# Altium PCB bmsSlavePCB_L.PcbDoc (part 1 of 3)
Units mil, origin at the board's own origin, x right, y up, seen from the top; angles counter-clockwise.
Board outline 6375 x 5335 mil, 2 copper layers (Top Layer, Bottom Layer); 224 components, 153 nets, 536 pads, 45 vias.
Unrouted connection lines stored in the file: 34.
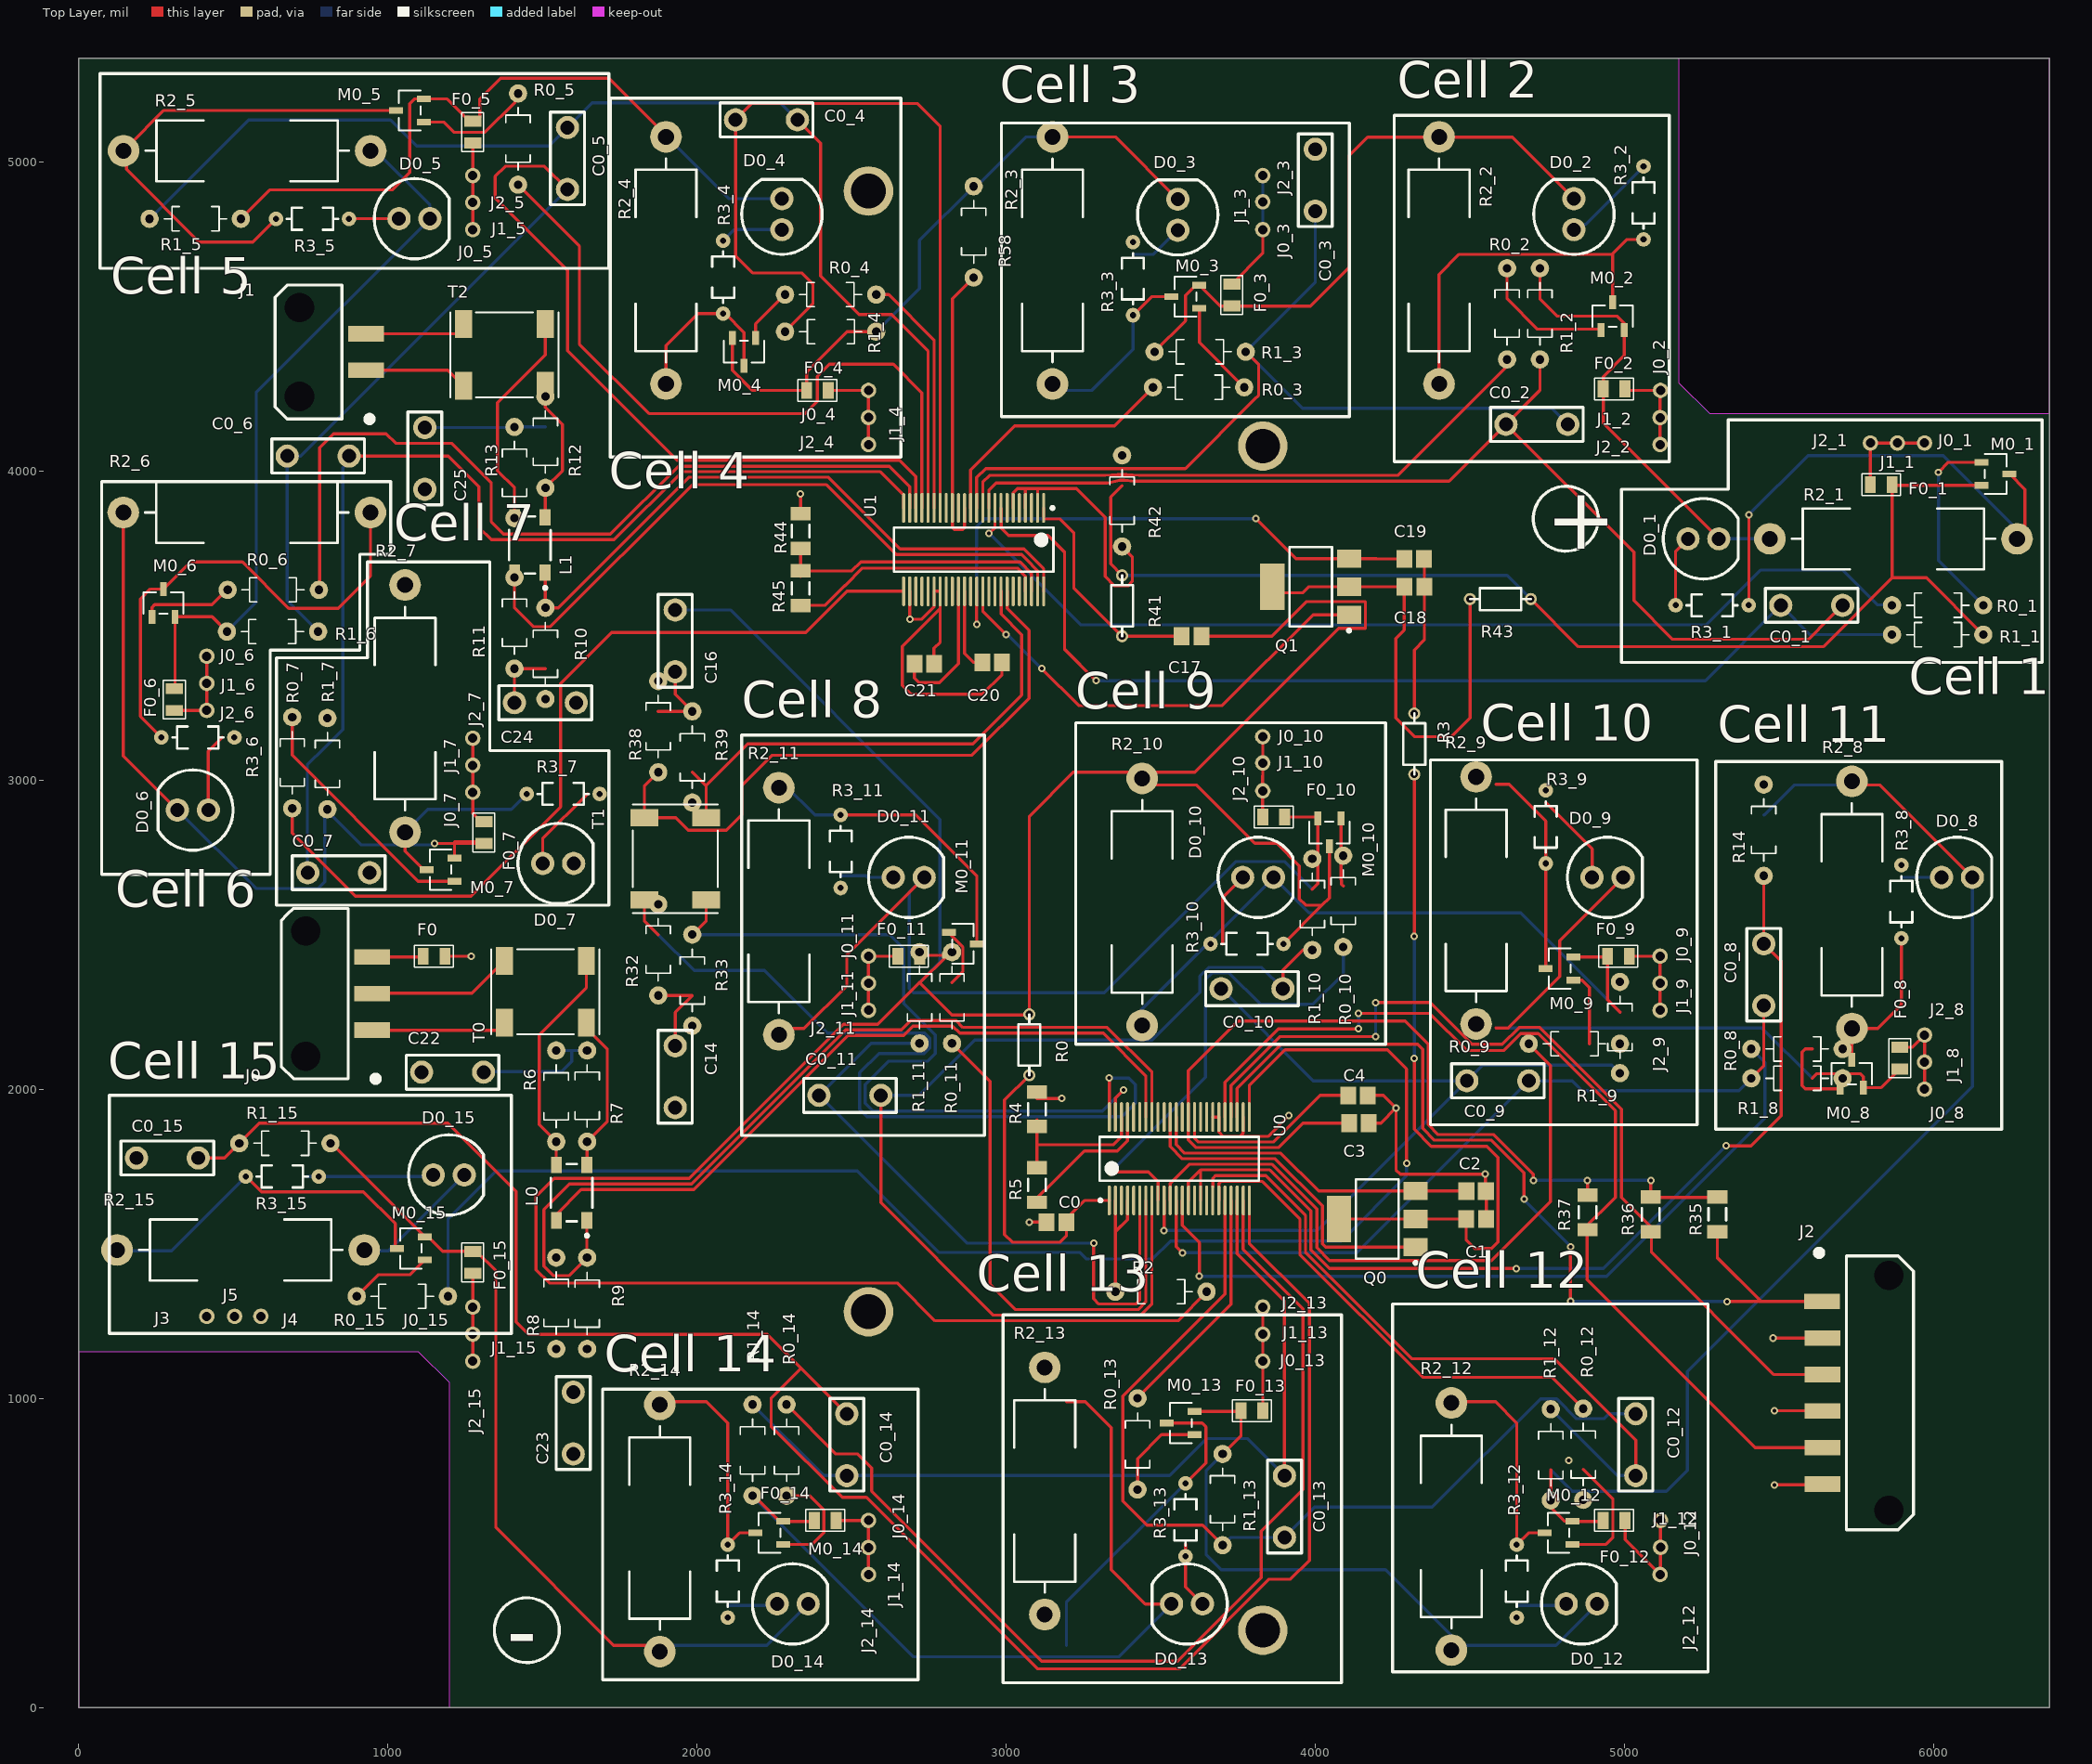
[diagram p0: Top Layer view]
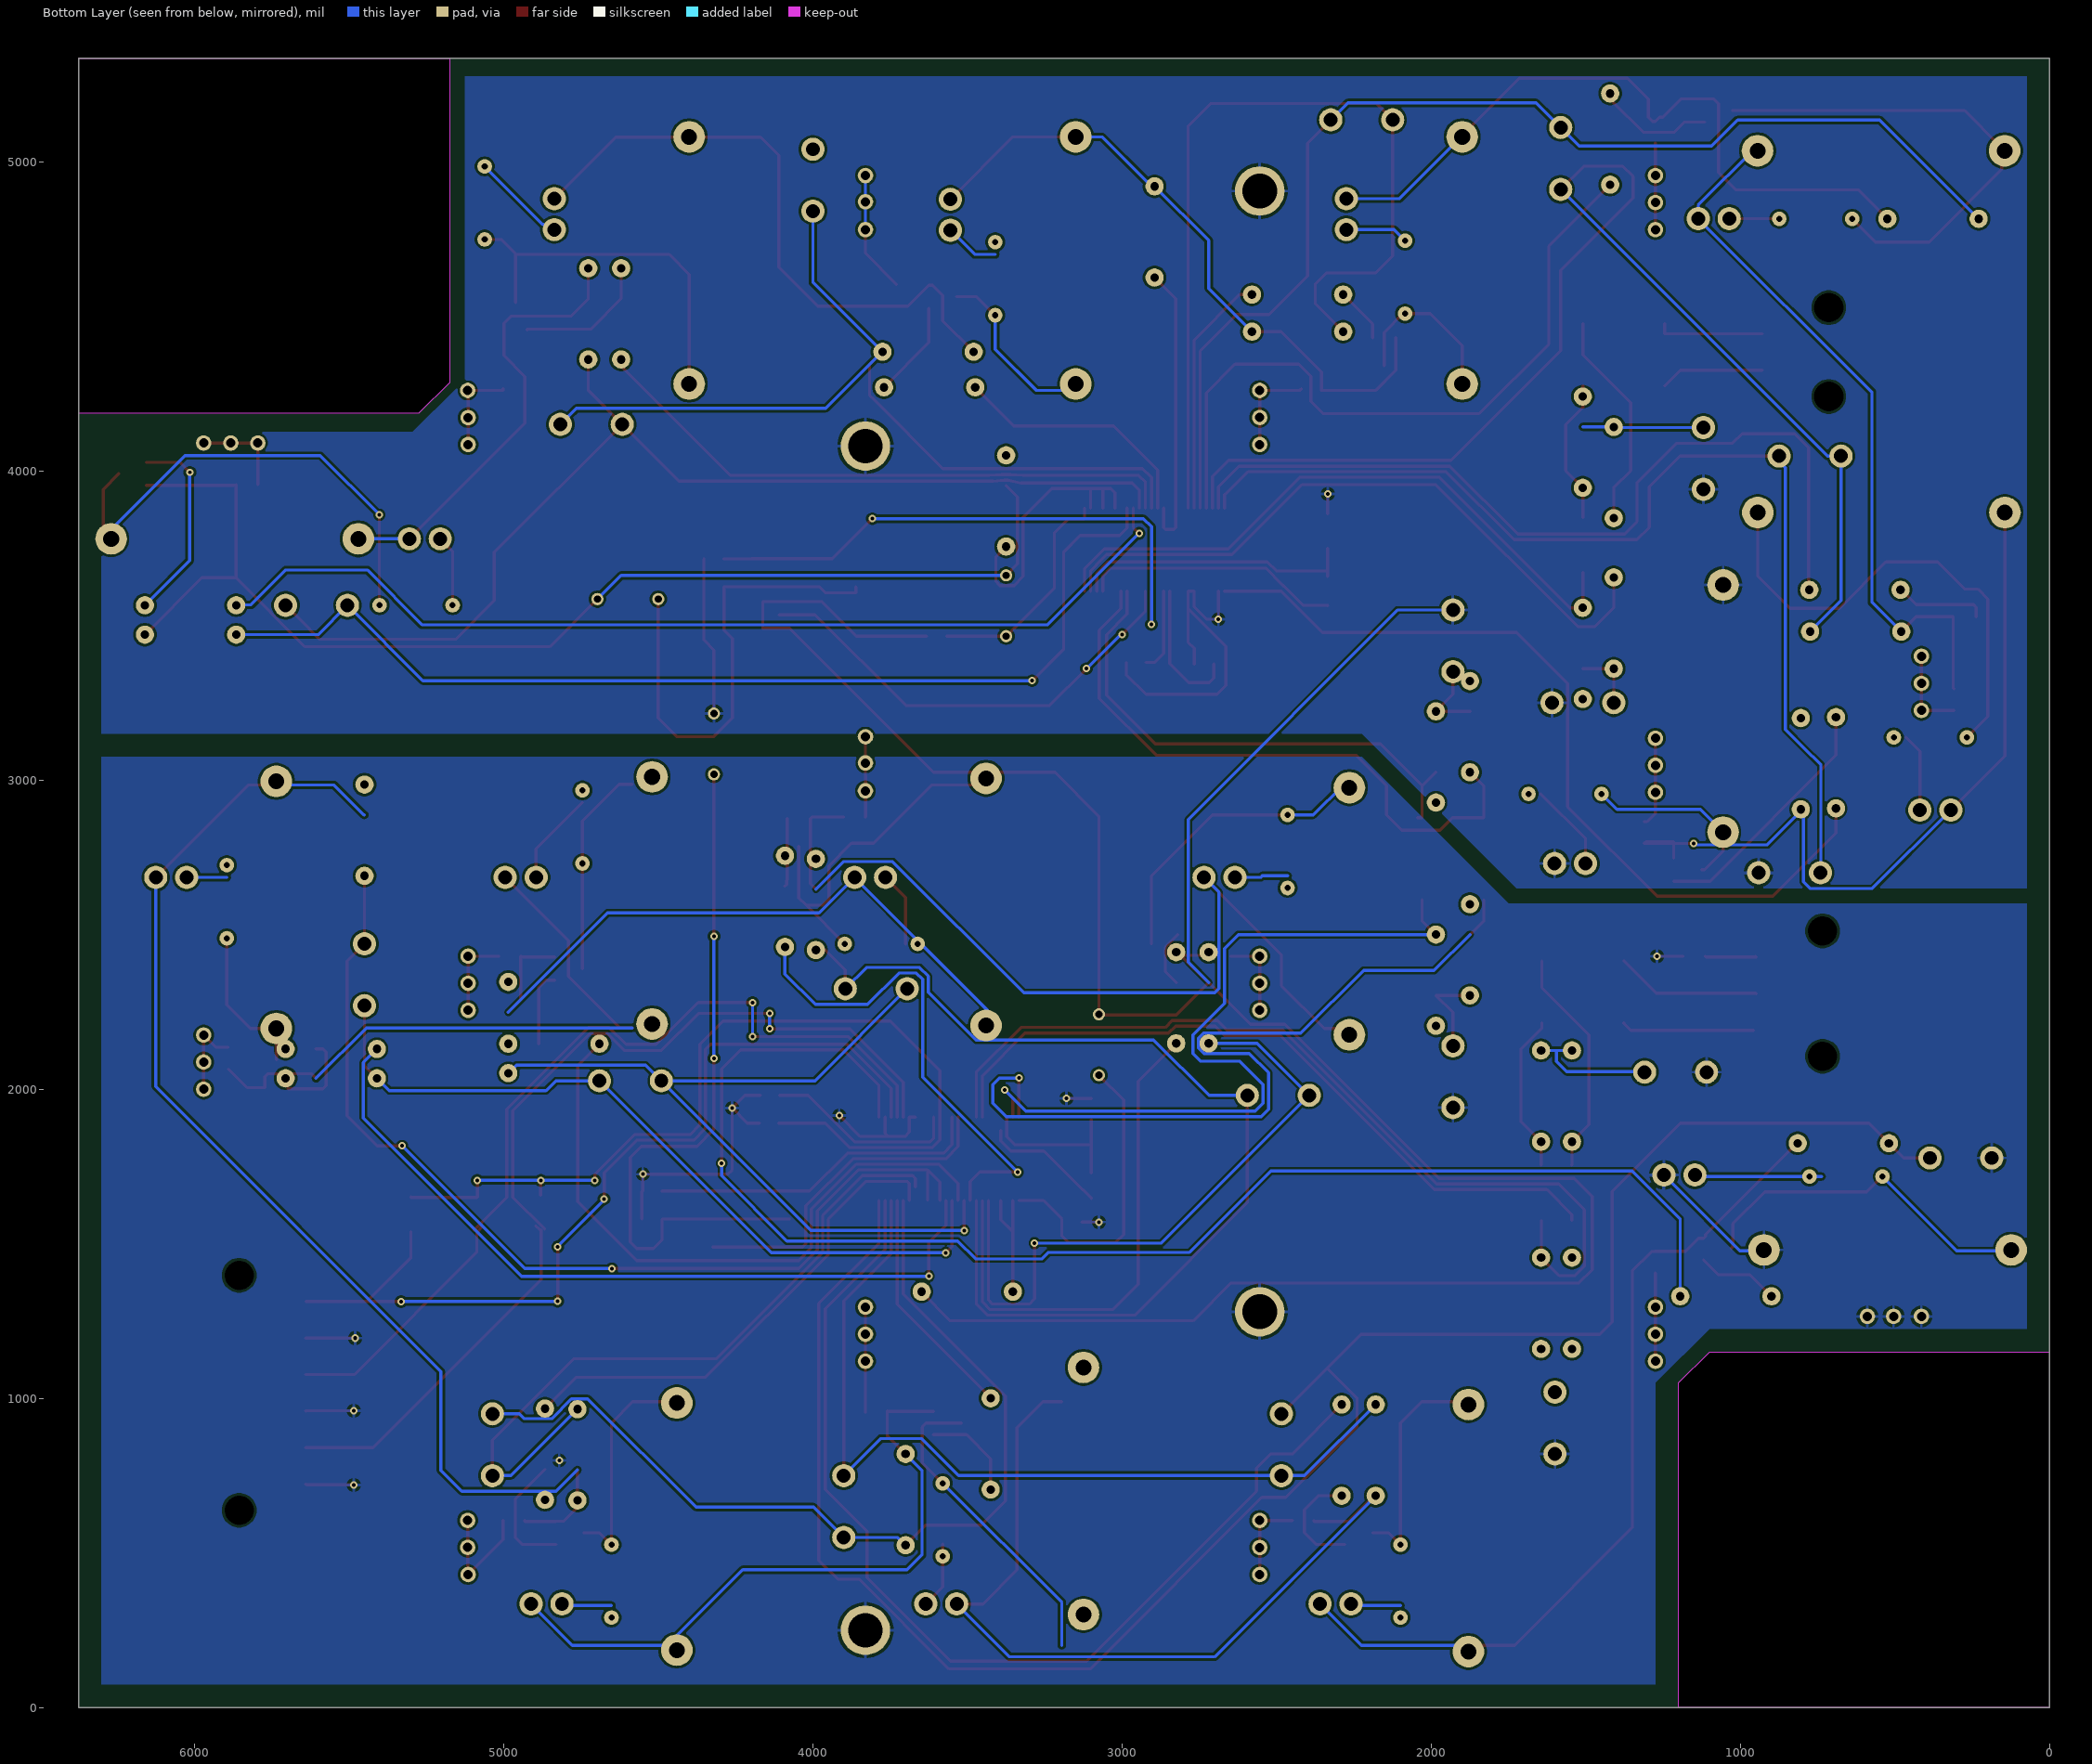
[diagram p1: Bottom Layer view, seen from below]

## Layer stack, top to bottom
Top Solder: solder mask 0.4, Solder Resist, Dk 3.5
Top Layer: signal copper 1.4
Dielectric 1: dielectric 12.6, FR-4, Dk 4.8
Bottom Layer: signal copper 1.4
Bottom Solder: solder mask 0.4, Solder Resist, Dk 3.5

## Board outline
0,0 6375,0 6375,5335 0,5335
cut-out: 6375,5335 5175,5335 5175,4285 5275,4185 6375,4185
cut-out: 0,0 1200,0 1200,1050 1100,1150 0,1150

## Design rules (kind name [scope] priority, off if disabled: settings)
Clearance [All] p1: gap=8 ignorepadtopadclearanceinfootprint=TRUE
PolygonConnect [All] p1: connectstyle=Relief reliefconductorwidth=10 reliefentries=4 polygonreliefangle="90 Angle" airgapwidth=10
RoomDefinition U_BalCircuitE [InComponentClass('U_BalCircuitE')] p1: confinementstyle=ConfineIn formatcopy=TRUE lockcomponents=FALSE outline 125.29,4933.02 125.29,5157.75 994.11,5157.75 994.11,5243.38 1149.11,5243.38 1149.11,5180.34 1324.02,5180.34 1324.02,5175.38 1651.61,5175.38 1651.61,4845.38 1322.62,4845.38 1322.62,4739.39 1214.2,4739.39 1214.2,4670.38 941.61,4670.38 941.61,4821.01 317.93,4821.01 317.93,4933.02
RoomDefinition U_BalCircuitM [InComponentClass('U_BalCircuitM')] p2: confinementstyle=ConfineIn formatcopy=TRUE lockcomponents=FALSE outline 3082.64,163.68 3082.64,1026.32 3783.99,1026.32 3783.99,1165.99 3783.99,1340.99 3875.99,1340.99 3875.99,815 3970,815 3970,485 3730,485 3730,190 3307.36,190 3307.36,163.68
RoomDefinition U_BalCircuitK [InComponentClass('U_BalCircuitK')] p3: confinementstyle=ConfineIn formatcopy=TRUE lockcomponents=FALSE outline 2172.64,2158.68 2172.64,3021.32 2397.36,3021.32 2397.36,2920.53 2514.37,2920.53 2514.37,2830 2812.58,2830 2812.58,2548 2937.5,2548 2937.5,2392 2874.37,2392 2874.37,2114.47 2660,2114.47 2660,1910 2330,1910 2330,2158.68
RoomDefinition U_BalCircuitI [InComponentClass('U_BalCircuitI')] p4: confinementstyle=ConfineIn formatcopy=TRUE lockcomponents=FALSE outline 4425,1956.85 4425,2096.85 4472.64,2096.85 4472.64,3023.17 4697.36,3023.17 4697.36,2960.53 4794.37,2960.53 4794.37,2830 5072.58,2830 5072.58,2476.01 5165.99,2476.01 5165.99,2209.01 5034.37,2209.01 5034.37,2018.17 4755,2018.17 4755,1956.85
RoomDefinition U_BalCircuitF [InComponentClass('U_BalCircuitF')] p5: confinementstyle=ConfineIn formatcopy=TRUE lockcomponents=FALSE outline 79.82,3748.7 79.82,3985.24 610,3985.24 610,4117.61 940,4117.61 940,3985.24 1009.39,3985.24 1009.39,3748.7 818.53,3748.7 818.53,3419.8 541.99,3419.8 541.99,3088.24 515,3088.24 515,2757.61 242.42,2757.61 242.42,3088.24 230.53,3088.24 230.53,3495.11 197,3495.11 197,3748.7
RoomDefinition U_BalCircuitH [InComponentClass('U_BalCircuitH')] p6: confinementstyle=ConfineIn formatcopy=TRUE lockcomponents=FALSE outline 5376.32,1985.63 5376.32,2179.37 5380,2179.37 5380,2535 5622.64,2535 5622.64,3021.32 5847.36,3021.32 5847.36,2830 6202.58,2830 6202.58,2540 6041.01,2540 6041.01,2129.01 6041.01,1954.01 5949.01,1954.01 5949.01,1972.5 5657,1972.5 5657,1985.63
RoomDefinition U_BalCircuitJ [InComponentClass('U_BalCircuitJ')] p7: confinementstyle=ConfineIn formatcopy=TRUE lockcomponents=FALSE outline 3322.87,2158.68 3322.87,3021.32 3783.89,3021.32 3783.89,3185.89 3875.89,3185.89 3875.89,3010.89 3876.12,3010.89 3876.12,2927.4 3939.96,2927.4 3939.96,2907.5 4123.24,2907.5 4123.24,2690.53 4139.61,2690.53 4139.61,2426.32 4039.61,2426.32 4039.61,2416.32 3960.24,2416.32 3960.24,2255 3547.6,2255 3547.6,2158.68
RoomDefinition U_BalCircuitL [InComponentClass('U_BalCircuitL')] p8: confinementstyle=ConfineIn formatcopy=TRUE lockcomponents=FALSE outline 4358.94,163.68 4358.94,1026.32 4583.66,1026.32 4583.66,1015 5106.3,1015 5106.3,651.01 5162.29,651.01 5162.29,559.01 5160.99,559.01 5160.99,384.01 4988.88,384.01 4988.88,190 4583.66,190 4583.66,163.68
RoomDefinition U_BalCircuitB [InComponentClass('U_BalCircuitB')] p9: confinementstyle=ConfineIn formatcopy=TRUE lockcomponents=FALSE outline 4358.94,4238.68 4358.94,5101.32 4583.66,5101.32 4583.66,4978.68 5110.67,4978.68 5110.67,4306.01 5162.31,4306.01 5162.31,4044.01 5070.31,4044.01 5070.31,4080 4551.3,4080 4551.3,4238.68
RoomDefinition U_BalCircuitO [InComponentClass('U_BalCircuitO')] p10: confinementstyle=ConfineIn formatcopy=TRUE lockcomponents=FALSE outline 116.27,1365.04 116.27,1589.76 122.6,1589.76 122.6,1847.4 507.06,1847.4 507.06,1851.77 853.23,1851.77 853.23,1852.94 1052.6,1852.94 1052.6,1867.4 1325.18,1867.4 1325.18,1577.4 1322.4,1577.4 1322.4,1365.04 1321.01,1365.04 1321.01,1074.01 1229.01,1074.01 1229.01,1359.4 1010.1,1359.4 1010.1,1365.04
RoomDefinition U_BalCircuitN [InComponentClass('U_BalCircuitN')] p11: confinementstyle=ConfineIn formatcopy=TRUE lockcomponents=FALSE outline 1807.4,163.68 1807.4,1026.32 2032.13,1026.32 2032.13,1015 2554.76,1015 2554.76,651.01 2605.76,651.01 2605.76,476.01 2605.99,476.01 2605.99,384.01 2437.35,384.01 2437.35,190 2032.13,190 2032.13,163.68
RoomDefinition U_BalCircuitG [InComponentClass('U_BalCircuitG')] p12: confinementstyle=ConfineIn formatcopy=TRUE lockcomponents=FALSE outline 641.93,2874.47 641.93,3138.68 943.93,3138.68 943.93,3656.32 1168.66,3656.32 1168.66,3226.01 1356.01,3226.01 1356.01,3051.01 1357.3,3051.01 1357.3,3004.37 1679.98,3004.37 1679.98,2905.63 1678.88,2905.63 1678.88,2585 1406.3,2585 1406.3,2630 676.3,2630 676.3,2874.47
RoomDefinition U_BalCircuitD [InComponentClass('U_BalCircuitD')] p13: confinementstyle=ConfineIn formatcopy=TRUE lockcomponents=FALSE outline 1807.64,4238.68 1807.64,5101.32 2060,5101.32 2060,5205 2390,5205 2390,4957.58 2420,4957.58 2420,4619.37 2538.68,4619.37 2538.68,4305.99 2600.99,4305.99 2600.99,4038.99 2508.99,4038.99 2508.99,4217.6 2310.04,4217.6 2310.04,4238.68
RoomDefinition U_BalCircuitC [InComponentClass('U_BalCircuitC')] p14: confinementstyle=ConfineIn formatcopy=TRUE lockcomponents=FALSE outline 3082.64,4236.83 3082.64,5099.47 3860,5099.47 3860,5103.15 4000,5103.15 4000,4773.15 3850.99,4773.15 3850.99,4732.16 3777.4,4732.16 3777.4,4493.19 3749.37,4493.19 3749.37,4192.61 3540.63,4192.61 3540.63,4236.83
RoomDefinition U_BalCircuitA [InComponentClass('U_BalCircuitA')] p15: confinementstyle=ConfineIn formatcopy=TRUE lockcomponents=FALSE outline 5110,3635 5110,3925 5749.01,3925 5749.01,4136 6016.01,4136 6016.01,4068 6277.5,4068 6277.5,3892.36 6361.95,3892.36 6361.95,3667.64 6203.53,3667.64 6203.53,3415.72 5821.47,3415.72 5821.47,3495 5440,3495 5440,3515.63 5127.38,3515.63 5127.38,3635
RoutingVias [All] p1: holewidth=28 width=50 viastyle="Through Hole" minholewidth=28 minwidth=50 maxholewidth=28 maxwidth=50
SolderMaskExpansion [All] p1: expansion=4 istentingtop=FALSE
Width [All] p1: maxlimit=10 minlimit=10 preferedwidth=10
30 further rules are at their usual default settings.

## Classes and differential pairs
channel class BalCircuit: U_BalCircuitA U_BalCircuitB U_BalCircuitC U_BalCircuitD U_BalCircuitE U_BalCircuitF U_BalCircuitG U_BalCircuitH U_BalCircuitI U_BalCircuitJ U_BalCircuitK U_BalCircuitL U_BalCircuitM U_BalCircuitN U_BalCircuitO U_BalCircuitP
component class U_BalCircuitO: C0_15 D0_15 F0_15 J0_15 J1_15 J2_15 M0_15 R0_15 R1_15 R2_15 R3_15
component class U_BalCircuitN: C0_14 D0_14 F0_14 J0_14 J1_14 J2_14 M0_14 R0_14 R1_14 R2_14 R3_14
component class U_BalCircuitM: C0_13 D0_13 F0_13 J0_13 J1_13 J2_13 M0_13 R0_13 R1_13 R2_13 R3_13
component class U_BalCircuitL: C0_12 D0_12 F0_12 J0_12 J1_12 J2_12 M0_12 R0_12 R1_12 R2_12 R3_12
component class U_BalCircuitK: C0_11 D0_11 F0_11 J0_11 J1_11 J2_11 M0_11 R0_11 R1_11 R2_11 R3_11
component class U_BalCircuitJ: C0_10 D0_10 F0_10 J0_10 J1_10 J2_10 M0_10 R0_10 R1_10 R2_10 R3_10
component class U_BalCircuitI: C0_9 D0_9 F0_9 J0_9 J1_9 J2_9 M0_9 R0_9 R1_9 R2_9 R3_9
component class U_BalCircuitH: C0_8 D0_8 F0_8 J0_8 J1_8 J2_8 M0_8 R0_8 R1_8 R2_8 R3_8
component class U_BalCircuitG: C0_7 D0_7 F0_7 J0_7 J1_7 J2_7 M0_7 R0_7 R1_7 R2_7 R3_7
component class U_BalCircuitF: C0_6 D0_6 F0_6 J0_6 J1_6 J2_6 M0_6 R0_6 R1_6 R2_6 R3_6
component class U_BalCircuitE: C0_5 D0_5 F0_5 J0_5 J1_5 J2_5 M0_5 R0_5 R1_5 R2_5 R3_5
component class U_BalCircuitD: C0_4 D0_4 F0_4 J0_4 J1_4 J2_4 M0_4 R0_4 R1_4 R2_4 R3_4
component class U_BalCircuitC: C0_3 D0_3 F0_3 J0_3 J1_3 J2_3 M0_3 R0_3 R1_3 R2_3 R3_3
component class U_BalCircuitB: C0_2 D0_2 F0_2 J0_2 J1_2 J2_2 M0_2 R0_2 R1_2 R2_2 R3_2
component class U_BalCircuitA: C0_1 D0_1 F0_1 J0_1 J1_1 J2_1 M0_1 R0_1 R1_1 R2_1 R3_1
component class Mosfets: M0_1 M0_2 M0_3 M0_4 M0_5 M0_6 M0_7 M0_8 M0_9 M0_10 M0_11 M0_12 M0_13 M0_14 M0_15
component class CellFuses: F0 F0_1 F0_2 F0_3 F0_4 F0_5 F0_6 F0_7 F0_8 F0_9 F0_10 F0_11 F0_12 F0_13 F0_14 F0_15

## Components (designator, comment, footprint, x,y, rotation, side; value= is the part's Value field where it differs from the comment)
C0 "0.1uF" CAPC2013X145X48NL20T23 3162.52,1570 r0 top
C0_1 "10nF" "Cap, 5mm TH, Ceramic" 5605,3565 r180 top value=Value? (schematic designator C0)
C0_2 "10nF" "Cap, 5mm TH, Ceramic" 4716.3,4150 r180 top value=Value? (schematic designator C0)
C0_3 "10nF" "Cap, 5mm TH, Ceramic" 4000,4940 r270 top value=Value? (schematic designator C0)
C0_4 "10nF" "Cap, 5mm TH, Ceramic" 2225,5135 r180 top value=Value? (schematic designator C0)
C0_5 "10nF" "Cap, 5mm TH, Ceramic" 1581.61,5010.38 r90 top value=Value? (schematic designator C0)
C0_6 "10nF" "Cap, 5mm TH, Ceramic" 775,4047.61 r180 top value=Value? (schematic designator C0)
C0_7 "10nF" "Cap, 5mm TH, Ceramic" 841.3,2700 r180 top value=Value? (schematic designator C0)
C0_8 "10nF" "Cap, 5mm TH, Ceramic" 5450,2370 r270 top value=Value? (schematic designator C0)
C0_9 "10nF" "Cap, 5mm TH, Ceramic" 4590,2026.85 r180 top value=Value? (schematic designator C0)
C0_10 "10nF" "Cap, 5mm TH, Ceramic" 3795.24,2325 r0 top value=Value? (schematic designator C0)
C0_11 "10nF" "Cap, 5mm TH, Ceramic" 2495,1980 r180 top value=Value? (schematic designator C0)
C0_12 "10nF" "Cap, 5mm TH, Ceramic" 5036.3,850 r270 top value=Value? (schematic designator C0)
C0_13 "10nF" "Cap, 5mm TH, Ceramic" 3900,650 r270 top value=Value? (schematic designator C0)
C0_14 "10nF" "Cap, 5mm TH, Ceramic" 2484.76,850 r270 top value=Value? (schematic designator C0)
C0_15 "10nF" "Cap, 5mm TH, Ceramic" 287.6,1777.4 r0 top value=Value? (schematic designator C0)
C1 "0.1uF" CAPC2013X145X48NL20T23 4520,1580 r0 top
C2 "1uF" CAPC2013X140X50NL20T25 4520,1670 r180 top
C3 "1uF" CAPC2013X140X50NL20T25 4141.5,1890 r180 top
C4 "1uF" CAPC2013X140X50NL20T25 4138.5,1980 r180 top
C14 "10nF" "Cap, 5mm TH, Ceramic" 1930,2040 r270 top value=Value?
C16 "10nF" "Cap, 5mm TH, Ceramic" 1930,3450 r270 top value=Value?
C17 "0.1uF" CAPC2013X145X48NL20T23 3600,3465 r180 top
C18 "0.1uF" CAPC2013X145X48NL20T23 4320,3625 r0 top
C19 "1uF" CAPC2013X140X50NL20T25 4320,3715 r180 top
C20 "1uF" CAPC2013X140X50NL20T25 2955,3380 r180 top
C21 "1uF" CAPC2013X140X50NL20T25 2735,3375 r180 top
C22 "10nF" "Cap, 5mm TH, Ceramic" 1210,2055 r0 top value=Value?
C23 "10nF" "Cap, 5mm TH, Ceramic" 1600,920 r90 top value=Value?
C24 "10nF" "Cap, 5mm TH, Ceramic" 1510,3250 r180 top value=Value?
C25 "10nF" "Cap, 5mm TH, Ceramic" 1120,4040 r90 top value=Value?
D0_1 "Green" "LED, TH" 5255,3780 r0 top (schematic designator D0)
D0_2 "Green" "LED, TH" 4836.3,4830 r90 top (schematic designator D0)
D0_3 "Green" "LED, TH" 3555,4828.15 r90 top (schematic designator D0)
D0_4 "Green" "LED, TH" 2275,4830 r90 top (schematic designator D0)
D0_5 "Green" "LED, TH" 1086.61,4815.38 r0 top (schematic designator D0)
D0_6 "Green" "LED, TH" 370,2902.61 r180 top (schematic designator D0)
D0_7 "Green" "LED, TH" 1551.3,2730 r0 top (schematic designator D0)
D0_8 "Green" "LED, TH" 6075,2685 r0 top (schematic designator D0)
D0_9 "Green" "LED, TH" 4945,2685 r0 top (schematic designator D0)
D0_10 "Green" "LED, TH" 3815,2685 r0 top (schematic designator D0)
D0_11 "Green" "LED, TH" 2685,2685 r0 top (schematic designator D0)
D0_12 "Green" "LED, TH" 4861.3,335 r0 top (schematic designator D0)
D0_13 "Green" "LED, TH" 3585,335 r180 top (schematic designator D0)
D0_14 "Green" "LED, TH" 2309.76,335 r0 top (schematic designator D0)
D0_15 "Green" "LED, TH" 1197.6,1722.4 r0 top (schematic designator D0)
F0 "1A" "Fuse, 0805" 1150,2430 r0 top
F0_1 "1A" "Fuse, 0805" 5830,3955 r180 top (schematic designator F0)
F0_2 "1A" "Fuse, 0805" 4966.3,4265 r0 top (schematic designator F0)
F0_3 "1A" "Fuse, 0805" 3730,4568.15 r90 top (schematic designator F0)
F0_4 "1A" "Fuse, 0805" 2390,4260 r0 top (schematic designator F0)
F0_5 "1A" "Fuse, 0805" 1275,5095.24 r270 top (schematic designator F0)
F0_6 "1A" "Fuse, 0805" 310,3260 r270 top (schematic designator F0)
F0_7 "1A" "Fuse, 0805" 1311.3,2830 r90 top (schematic designator F0)
F0_8 "1A" "Fuse, 0805" 5890,2100 r90 top (schematic designator F0)
F0_9 "1A" "Fuse, 0805" 4980,2430 r0 top (schematic designator F0)
F0_10 "1A" "Fuse, 0805" 3865,2880 r180 top (schematic designator F0)
F0_11 "1A" "Fuse, 0805" 2685,2430 r180 top (schematic designator F0)
F0_12 "1A" "Fuse, 0805" 4966.3,605 r0 top (schematic designator F0)
F0_13 "1A" "Fuse, 0805" 3795,960 r0 top (schematic designator F0)
F0_14 "1A" "Fuse, 0805" 2414.76,605 r0 top (schematic designator F0)
F0_15 "1A" "Fuse, 0805" 1275,1440 r270 top (schematic designator F0)
J0 "43650-0309" 43650-0309 734.65,2309.06 r270 top locked
J0_1 "Pogo Pin" 0929 5970,4090 r0 top (schematic designator J0)
J0_2 "Pogo Pin" 0929 5116.3,4260 r0 top (schematic designator J0)
J0_3 "Pogo Pin" 0929 3830,4780 r90 top (schematic designator J0)
J0_4 "Pogo Pin" 0929 2555,4260 r180 top (schematic designator J0)
J0_5 "Pogo Pin" 0929 1275,4780 r0 top (schematic designator J0)
J0_6 "Pogo Pin" 0929 415,3400 r0 top (schematic designator J0)
J0_7 "Pogo Pin" 0929 1275,2960 r0 top (schematic designator J0)
J0_8 "Pogo Pin" 0929 5970,2000 r0 top (schematic designator J0)
J0_9 "Pogo Pin" 0929 5115,2430 r90 top (schematic designator J0)
J0_10 "Pogo Pin" 0929 3829.88,3139.88 r0 top (schematic designator J0)
J0_11 "Pogo Pin" 0929 2555,2430 r0 top (schematic designator J0)
J0_12 "Pogo Pin" 0929 5116.3,605 r90 top (schematic designator J0)
J0_13 "Pogo Pin" 0929 3830,1120 r180 top (schematic designator J0)
J0_14 "Pogo Pin" 0929 2554.76,605 r90 top (schematic designator J0)
J0_15 "Pogo Pin" 0929 1275,1295 r0 top (schematic designator J0)
J1 "43650-0209" 43650-0209 714.65,4384.06 r270 top locked
J1_1 "Pogo Pin" 0929 5882.5,4090 r0 top (schematic designator J1)
J1_2 "Pogo Pin" 0929 5115,4171.85 r0 top (schematic designator J1)
J1_3 "Pogo Pin" 0929 3830,4870 r0 top (schematic designator J1)
J1_4 "Pogo Pin" 0929 2555,4172.5 r0 top (schematic designator J1)
J1_5 "Pogo Pin" 0929 1275,4867.5 r0 top (schematic designator J1)
J1_6 "Pogo Pin" 0929 415,3312.5 r0 top (schematic designator J1)
J1_7 "Pogo Pin" 0929 1275,3047.5 r0 top (schematic designator J1)
J1_8 "Pogo Pin" 0929 5970,2087.5 r0 top (schematic designator J1)
J1_9 "Pogo Pin" 0929 5115,2342.5 r0 top (schematic designator J1)
J1_10 "Pogo Pin" 0929 3830,3055 r0 top (schematic designator J1)
J1_11 "Pogo Pin" 0929 2555,2342.5 r0 top (schematic designator J1)
J1_12 "Pogo Pin" 0929 5116.3,518.15 r0 top (schematic designator J1)
J1_13 "Pogo Pin" 0929 3830,1207.5 r0 top (schematic designator J1)
J1_14 "Pogo Pin" 0929 2555,517.38 r90 top (schematic designator J1)
J1_15 "Pogo Pin" 0929 1275,1207.5 r0 top (schematic designator J1)
J2 "43650-0609" 43650-0609 5855.35,1017.83 r90 top locked
J2_1 "Pogo Pin" 0929 5795,4090 r0 top (schematic designator J2)
J2_2 "Pogo Pin" 0929 5115,4085 r0 top (schematic designator J2)
J2_3 "Pogo Pin" 0929 3830,4955 r90 top (schematic designator J2)
J2_4 "Pogo Pin" 0929 2555,4085 r180 top (schematic designator J2)
J2_5 "Pogo Pin" 0929 1275,4955 r0 top (schematic designator J2)
J2_6 "Pogo Pin" 0929 415,3225 r0 top (schematic designator J2)
J2_7 "Pogo Pin" 0929 1275,3135 r0 top (schematic designator J2)
J2_8 "Pogo Pin" 0929 5970,2175 r0 top (schematic designator J2)
J2_9 "Pogo Pin" 0929 5115,2255 r90 top (schematic designator J2)
J2_10 "Pogo Pin" 0929 3830.12,2964.88 r0 top (schematic designator J2)
J2_11 "Pogo Pin" 0929 2555,2255 r0 top (schematic designator J2)
J2_12 "Pogo Pin" 0929 5115,430 r90 top (schematic designator J2)
J2_13 "Pogo Pin" 0929 3830,1295 r180 top (schematic designator J2)
J2_14 "Pogo Pin" 0929 2555,430 r90 top (schematic designator J2)
J2_15 "Pogo Pin" 0929 1275,1120 r0 top (schematic designator J2)
J3 "Pogo Pin" 0929 415,1265 r180 top
J4 "Pogo Pin" 0929 590,1265 r90 top
J5 "Pogo Pin" 0929 505,1265 r0 top
L0 "DLW43SH101XK2L" FP-DLW43-0_2-t2_6-e0_6-MFG 1595,1665 r90 top
L1 "DLW43SH101XK2L" FP-DLW43-0_2-t2_6-e0_6-MFG 1460,3760 r90 top
M0_1 "NDS332P" SOT23_527AG_ONS 6200,3990 r270 top (schematic designator M0)
M0_2 "NDS332P" SOT23_527AG_ONS 4961.3,4500 r0 top (schematic designator M0)
M0_3 "NDS332P" SOT23_527AG_ONS 3580,4563.15 r90 top (schematic designator M0)
M0_4 "NDS332P" SOT23_527AG_ONS 2152.4,4385 r180 top (schematic designator M0)
M0_5 "NDS332P" SOT23_527AG_ONS 1071.61,5165.38 r90 top (schematic designator M0)
M0_6 "NDS332P" SOT23_527AG_ONS 275,3572.61 r0 top (schematic designator M0)
M0_7 "NDS332P" SOT23_527AG_ONS 1171.3,2710 r90 top (schematic designator M0)
M0_8 "NDS332P" SOT23_527AG_ONS 5735,2050 r0 top (schematic designator M0)
M0_9 "NDS332P" SOT23_527AG_ONS 4790,2390 r90 top (schematic designator M0)
M0_10 "NDS332P" SOT23_527AG_ONS 4045.24,2830 r180 top (schematic designator M0)
M0_11 "NDS332P" SOT23_527AG_ONS 2860,2470 r270 top (schematic designator M0)
M0_12 "NDS332P" SOT23_527AG_ONS 4786.3,565 r90 top (schematic designator M0)
M0_13 "NDS332P" SOT23_527AG_ONS 3565,920 r90 top (schematic designator M0)
M0_14 "NDS332P" SOT23_527AG_ONS 2234.76,565 r90 top (schematic designator M0)
M0_15 "NDS332P" SOT23_527AG_ONS 1075,1485 r90 top (schematic designator M0)
Q0 "NSV1C201MZ4T1G" ONSC-SOT-223-4-318E-04_V 4200,1580 r180 top
Q1 "NSV1C201MZ4T1G" ONSC-SOT-223-4-318E-04_V 3985,3625 r180 top
R0 "100R 1/2W" TH100R 3075,2045 r90 top
R0_1 "3.3KR" "Q Watt" 5865,3565 r0 top (schematic designator R0)
R0_2 "3.3KR" "Q Watt" 4620,4360 r90 top (schematic designator R0)
R0_3 "3.3KR" "Q Watt" 3475,4270 r0 top (schematic designator R0)
R0_4 "3.3KR" "Q Watt" 2580,4570 r180 top (schematic designator R0)
R0_5 "3.3KR" "Q Watt" 1421.61,4925.38 r90 top (schematic designator R0)
R0_6 "3.3KR" "Q Watt" 777.5,3615 r180 top (schematic designator R0)
R0_7 "3.3KR" "Q Watt" 691.3,2908.15 r90 top (schematic designator R0)
R0_8 "3.3KR" "Q Watt" 5410,2130 r0 top (schematic designator R0)
R0_9 "3.3KR" "Q Watt" 4690,2146.85 r0 top (schematic designator R0)
R0_10 "3.3KR" "Q Watt" 4090.24,2460 r90 top (schematic designator R0)
R0_11 "3.3KR" "Q Watt" 2825,2148.15 r90 top (schematic designator R0)
R0_12 "3.3KR" "Q Watt" 4866.3,966.85 r270 top (schematic designator R0)
R0_13 "3.3KR" "Q Watt" 3425,1000 r270 top (schematic designator R0)
R0_14 "3.3KR" "Q Watt" 2290,980 r270 top (schematic designator R0)
R0_15 "3.3KR" "Q Watt" 1195,1330 r180 top (schematic designator R0)
R1_1 "100R" "Q Watt" 5865,3470 r0 top (schematic designator R1)
R1_2 "100R" "Q Watt" 4726.3,4360 r90 top (schematic designator R1)
R1_3 "100R" "Q Watt" 3775,4385 r180 top (schematic designator R1)
R1_4 "100R" "Q Watt" 2285,4450 r0 top (schematic designator R1)
R1_5 "100R" "Q Watt" 230,4815 r0 top (schematic designator R1)
R1_6 "100R" "Q Watt" 775,3480 r180 top (schematic designator R1)
R1_7 "100R" "Q Watt" 805,3200 r270 top (schematic designator R1)
R1_8 "100R" "Q Watt" 5410,2035 r0 top (schematic designator R1)
R1_9 "100R" "Q Watt" 4985,2051.85 r90 top (schematic designator R1)
R1_10 "100R" "Q Watt" 3990.24,2450 r90 top (schematic designator R1)
R1_11 "100R" "Q Watt" 2720,2148.15 r90 top (schematic designator R1)
R1_12 "100R" "Q Watt" 4761.3,965 r270 top (schematic designator R1)
R1_13 "100R" "Q Watt" 3700,525 r90 top (schematic designator R1)
R1_14 "100R" "Q Watt" 2180,980 r270 top (schematic designator R1)
R1_15 "100R" "Q Watt" 520,1825 r0 top (schematic designator R1)
R2 "100R" "Q Watt" 3353.15,1345 r0 top
R2_1 "16R 2W" TH16R 5470,3780 r0 top (schematic designator R2)
R2_2 "16R 2W" TH16R 4400,5080 r270 top (schematic designator R2)
R2_3 "16R 2W" TH16R 3150,5080 r270 top (schematic designator R2)
R2_4 "16R 2W" TH16R 1900,5080 r270 top (schematic designator R2)
R2_5 "16R 2W" TH16R 945,5035 r180 top (schematic designator R2)
R2_6 "16R 2W" TH16R 145,3865 r0 top (schematic designator R2)
R2_7 "16R 2W" TH16R 1056.3,3630.51 r270 top (schematic designator R2)
R2_8 "16R 2W" TH16R 5735,2995.51 r270 top (schematic designator R2)
R2_9 "16R 2W" TH16R 4520,2210.79 r90 top (schematic designator R2)
R2_10 "16R 2W" TH16R 3440,2205.79 r90 top (schematic designator R2)
R2_11 "16R 2W" TH16R 2265,2175.79 r90 top (schematic designator R2)
R2_12 "16R 2W" TH16R 4440,185.79 r90 top (schematic designator R2)
R2_13 "16R 2W" TH16R 3125,300.79 r90 top (schematic designator R2)
R2_14 "16R 2W" TH16R 1880,180.79 r90 top (schematic designator R2)
R2_15 "16R 2W" TH16R 924.21,1480 r180 top (schematic designator R2)
R3 "100R 1/2W" Th100R 4320,3018.15 r90 top
R3_1 "180R" Th3.3KR 5401.22,3565 r180 top (schematic designator R3)
R3_2 "180R" Th3.3KR 5061.3,4748.15 r90 top (schematic designator R3)
R3_3 "180R" Th3.3KR 3410,4503.15 r90 top (schematic designator R3)
R3_4 "180R" Th3.3KR 2085,4508.15 r90 top (schematic designator R3)
R3_5 "180R" Th3.3KR 638.78,4815 r0 top (schematic designator R3)
R3_6 "180R" Th3.3KR 268.15,3137.61 r0 top (schematic designator R3)
R3_7 "180R" Th3.3KR 1449.45,2955 r0 top (schematic designator R3)
R3_8 "180R" Th3.3KR 5895,2488.15 r90 top (schematic designator R3)
R3_9 "180R" Th3.3KR 4745,2730 r90 top (schematic designator R3)
R3_10 "180R" Th3.3KR 3897.09,2470 r180 top (schematic designator R3)
R3_11 "180R" Th3.3KR 2465,2886.85 r270 top (schematic designator R3)
R3_12 "180R" Th3.3KR 4651.3,526.85 r270 top (schematic designator R3)
R3_13 "180R" Th3.3KR 3580,725 r270 top (schematic designator R3)
R3_14 "180R" Th3.3KR 2099.76,526.85 r270 top (schematic designator R3)
R3_15 "180R" Th3.3KR 540.75,1717.4 r0 top (schematic designator R3)
R4 "1.21KR" RESC3216X70X50NL05T20 3100,1935 r270 top
R5 "806R" RESC3216X70X50NL05T20 3100,1690 r270 top
R6 "300R" "Q Watt" 1545,2125 r270 top
R7 "300R" "Q Watt" 1645,1830 r90 top
R8 "62R" "Q Watt" 1545,1160 r90 top
R9 "62R" "Q Watt" 1645,1455 r270 top
R10 "62R" "Q Watt" 1510,3556.85 r270 top
R11 "62R" "Q Watt" 1410,3360 r90 top
R12 "300R" "Q Watt" 1510,3945 r90 top
R13 "300R" "Q Watt" 1410,4141.85 r270 top
R14 "100R" "Q Watt" 5450,2690 r90 top
R32 "62R" "Q Watt" 1875,2303.15 r90 top
R33 "62R" "Q Watt" 1985,2500 r270 top
R35 "10kR" RESC3216X70X50NL05T20 5300,1595 r90 top
R36 "10kR" RESC3216X70X50NL05T20 5085,1595 r90 top
R37 "10kR" RESC3216X70X50NL05T20 4880,1601.61 r90 top
R38 "62R" "Q Watt" 1875,3025 r90 top
R39 "62R" "Q Watt" 1985,3221.85 r270 top
R41 "100R 1/2W" TH100R 3375,3465 r90 top
R42 "100R" "Q Watt" 3375,3755 r90 top
R43 "100R 1/2W" TH100R 4500,3585 r0 top
R44 "1.21KR" RESC3216X70X50NL05T20 2335,3805 r270 top
R45 "806R" RESC3216X70X50NL05T20 2335,3620 r270 top
R58 "100R" "Q Watt" 2895,4625 r90 top
T0 "PE-68386NLT" PE-68386NL_PUL 1510,2315 r0 top
T1 "PE-68386NLT" PE-68386NL_PUL 1930,2745 r90 top
T2 "PE-68386NLT" PE-68386NL_PUL 1377.5,4375 r180 top
U0 "LTC6804HG-1#TRPBF" LT-G-48_M 3560,1775 r90 top locked
U1 "LTC6804HG-1#TRPBF" LT-G-48_M 2895,3745 r270 top locked

## Footprints (in the part's own frame and the unit in brackets; to place one, negate y for a bottom-side part, rotate by r counter-clockwise, add the part's x,y. Pads: shape width x height; smd on the part's side, far side on the other; paste and mask are expansions set on the pad)
0929 [mil] "Mill-Max Spring Loaded Contact"
  round 50 hole 30: 0(0,0)
  body extent -36,-36 36,36, height 220
43650-0209 [mm] "Molex 2 Position Board Header, Right Angle"
  rect 1.27x2.92 smd: 1(1.5,5.47) 2(-1.5,5.47)
  round 0 hole 2.41 unplated: ""(-3.65,0) ""(3.65,0)
  silkscreen extent -5.5,-2 5.7,5.95, body extent -4.82,-4.6 4.83,6.14, height 5.64
43650-0309 [mm] "Molex 3 Position Board Header, Right Angle"
  rect 1.27x2.92 smd: 1(3,5.47) 2(0,5.47) 3(-3,5.47)
  round 0 hole 2.41 unplated: ""(-5.15,0) ""(5.15,0)
  silkscreen extent -7,-2 7.2,5.95, body extent -6.32,-4.6 6.33,6.14, height 5.64
43650-0609 [mm] "Molex 6 Position Board Header, Right Angle"
  rect 1.27x2.92 smd: 1(7.5,5.5) 2(4.5,5.47) 3(1.5,5.47) 4(-1.5,5.47) 5(-4.5,5.47) 6(-7.5,5.47)
  round 0 hole 2.41 unplated: ""(-9.65,0) ""(9.65,0)
  silkscreen extent -11.25,-2 11.7,5.95, body extent -10.82,-4.6 10.82,6.14, height 5.64
"Cap, 5mm TH, Ceramic" [mil] "Through Hole Cap, Ceramic"
  round 75 hole 45: 1(-100,0) 2(100,0)
  silkscreen extent -150,-55 150,55, body extent -109,-59 109,59, height 176
CAPC2013X140X50NL20T25 [mm] "Chip Capacitor, 2-Leads, Body 2.00x1.25mm, IPC Medium Density"
  rect 1.3x1.45 smd: 1(-0.8,0) 2(0.8,0)
  body extent -1.1,-0.72 1.1,0.72, height 1.4
CAPC2013X145X48NL20T23 [mm] "Chip Capacitor, 2-Leads, Body 2.00x1.25mm, IPC Medium Density"
  rect 1.3x1.45 smd: 1(-0.825,0) 2(0.825,0)
  body extent -1.1,-0.72 1.1,0.72, height 1.45
FP-DLW43-0_2-t2_6-e0_6-MFG [mm]
  rect 1.35x0.9 smd paste+0 mask+0: 1(-2.275,-1.25) 2(2.275,-1.25) 3(2.275,1.25) 4(-2.275,1.25)
  silkscreen extent -3.65,-1.7 2.35,1.7, body extent -3.05,-1.8 3.05,1.8, height 0.25
"Fuse, 0805" [mil] "Generic 0805 SMD Fuse"
  rect 35.51x55 smd: 1(-35.24,0) 2(35.24,0)
  silkscreen extent -63,-35 63,35, body extent -33,-18 33,18, height 22
"LED, TH" [mil] "Through Hole LED"
  round 75 hole 45: 1(-50,0) 2(50,0)
  silkscreen extent -130,-130 113,130, body extent -118,-118 98,118, height 346
LT-G-48_M [mm] "SOP, 48-Leads, Body 13.1x5.6mm, Pitch 0.5mm, IPC Low Density"
  oval 2.45x0.25 smd: 1(-3.425,5.75) 2(-3.425,5.25) 3(-3.425,4.75) 4(-3.425,4.25) 5(-3.425,3.75) 6(-3.425,3.25) 7(-3.425,2.75) 8(-3.425,2.25) 9(-3.425,1.75) 10(-3.425,1.25) 11(-3.425,0.75) 12(-3.425,0.25) 13(-3.425,-0.25) 14(-3.425,-0.75) 15(-3.425,-1.25) 16(-3.425,-1.75) 17(-3.425,-2.25) 18(-3.425,-2.75) 19(-3.425,-3.25) 20(-3.425,-3.75) 21(-3.425,-4.25) 22(-3.425,-4.75) 23(-3.425,-5.25) 24(-3.425,-5.75) 25(3.425,-5.75) 26(3.425,-5.25) 27(3.425,-4.75) 28(3.425,-4.25) 29(3.425,-3.75) 30(3.425,-3.25) 31(3.425,-2.75) 32(3.425,-2.25) 33(3.425,-1.75) 34(3.425,-1.25) 35(3.425,-0.75) 36(3.425,-0.25) 37(3.425,0.25) 38(3.425,0.75) 39(3.425,1.25) 40(3.425,1.75) 41(3.425,2.25) 42(3.425,2.75) 43(3.425,3.25) 44(3.425,3.75) 45(3.425,4.25) 46(3.425,4.75) 47(3.425,5.25) 48(3.425,5.75)
  silkscreen extent -3.55,-6.55 1.8,6.6, body extent -2.8,-6.55 2.8,6.55, height 2
ONSC-SOT-223-4-318E-04_V [mm] "SOT223, 4-Leads, Body 6.5x3.5mm, Pitch 2.3mm"
  rect 2x1.5 smd: 1(-3.15,2.3) 2(-3.15,0) 3(-3.15,-2.3)
  rect 2x3.8 smd: 4(3.15,0)
  silkscreen extent -3.27,-3.25 1.75,3.72, body extent -1.75,-3.25 1.75,3.25, height 1.75
PE-68386NL_PUL [mil]
  rect 55x90 smd paste-27.5 mask+0: 1(-132.5,100) 2(-132.5,-100) 3(132.5,-100) 4(132.5,100)
  silkscreen extent -175,-138 175,138, body extent 0,0 10,10, height 10
"Q Watt" [mm] "1/8W Thruhole"
  round 1.5 hole 0.7: 1(0,0) 2(7.493,0)
  silkscreen extent 1.18,-1 6.33,1, body extent -0.24,-1.12 7.66,1.03, height 2.17
RESC3216X70X50NL05T20 [mm] "Chip Resistor, 2-Leads, Body 3.20x1.60mm, IPC Medium Density"
  rect 1.1x1.65 smd: 1(-1.425,0) 2(1.425,0)
  silkscreen extent -0.5,-0.72 0.5,0.72, body extent -1.63,-0.82 1.62,0.82, height 0.7
SOT23_527AG_ONS [mil]
  rect 22x45 smd paste+0 mask+0: 1(-37.4,-45) 2(37.4,-45) 3(0,45)
  silkscreen extent -65,-35 65,35, body extent -60,-30 60,30, height 30
Th3.3KR [mm]
  round 1.2 hole 0.5: 1(0,0) 2(6,0)
  silkscreen extent 0.9,-0.9 5.1,0.9, body extent -0.2,-0.9 6.2,0.9, height 1.9
TH16R [mm]
  round 2.6 hole 1.3: 1(0,0) 2(20.3,0)
  silkscreen extent 1.8,-2.5 18.5,2.5, body extent -0.31,-2.7 20.71,2.8, height 5.5
TH100R [mm] "1/8W Thruhole"
  round 1 hole 0.6: 1(0,0) 2(5,0)
  silkscreen extent 0,-0.9 5,0.9, body extent -0.22,-0.9 5.23,0.89, height 1.9
Th100R [mm] "1/8W Thruhole"
  round 1 hole 0.6: 1(0,0) 2(5,0)
  silkscreen extent 0,-0.9 5,0.9, body extent -0.22,-0.9 5.23,0.89, height 1.9

## Part data
C0 C1 C17 C18: library part CMP-2007-01705-1, Manufacturer=Vitramon, Part Number=VJ0805Y104KXAMR
C0_1 C0_2 C0_3 C0_4 C0_5 C0_6 C0_7 C0_8 C0_9 C0_10 C0_11 C0_12 C0_13 C0_14 C0_15 C14 C16 C22 C23 C24 C25: library part "Cap, 5MM TH, Ceramic", "Generic Cap, 5MM TH, Ceramic", Published=22Oct2016, Publisher=T.Tallo, Status=Active, TargetLibrary=RITRacing-Passives
C2 C3 C4 C19 C20 C21: library part CMP-1036-04765-2, Manufacturer="AVX Interconnect / Elco", Part Number=08055G105ZAT2A
D0_1 D0_2 D0_3 D0_4 D0_5 D0_6 D0_7 D0_8 D0_9 D0_10 D0_11 D0_12 D0_13 D0_14 D0_15: library part TLHG6400CS12Z, "LED Uni-Color Green 565nm 2-Pin T-1 3/4 T/R", Case/Package=Radial, Forward Current=30mA, Forward Voltage=2.4V, Manufacturer 1="Vishay Semiconductors", Max Operating Temperature=100°C, Min Operating Temperature=-40°C, Power Dissipation=100mW, Reverse Voltage=15V, Test Current=10mA, Category=LEDs, Color=Green, ComponentLink1Description=https://datasheet.ciiva.com/26262/tlhg640-26262876.pdf?src-supplier=Avnet+Europe, ComponentLink1URL=https://datasheet.ciiva.com/26262/tlhg640-26262876.pdf?src-supplier=Avnet+Europe, Depth=5.8mm, Dominant Wavelength=569nm, Height=9mm, Length=5.8mm, Lens Size=5mm, Lens Style=Round,Domed,Diffused,Colored,Circular, Lens Transparency=Diffused, Luminous Intensity=10mcd, Manufacturer Part Number 1=TLHG6400CS12Z, Mount="Through Hole", Number of Elements=1, Number of LEDs=1, Number of Pins=2, Packaging="Tape and Reel", Pricing 1="1=0.46000, 10=0.28000, 100=0.16120 (USD)", Radiation Hardening=No, RoHS=Yes, Stock 1=4186, Supplier 1=Digi-Key, Viewing Angle=60°
F0 F0_1 F0_2 F0_3 F0_4 F0_5 F0_6 F0_7 F0_8 F0_9 F0_10 F0_11 F0_12 F0_13 F0_14 F0_15: library part "Fuse, 0805", "Generic 0805 Fuse", Manufacturer_Part_Number=MFU0805FF01000P100, Built_By=EMA_UL_Team, ClassName=CellFuses, Copyright="Copyright (C) 2018 Accelerated Designs. All rights reserved", RefDes=RefDes, SourceLibrary=Vishay_2010-01-01_FUSE_MFU, Type=DEV, Vendor=VISHAY
J0: "Molex 3 Position Board Header, RIght Angle", Manufacturer=Molex, Voltage=600V, ComponentLink1Description=Datasheet, ComponentLink1URL=http://www.mouser.com/ds/2/418/NG_CD_1445088_A1-614413.pdf, PartNumber=43650-0309, Published=13Aug2018, Publisher=T.Tallo, Status=Active, TargetLibrary=RITRacing-Connectors
J0_1 J0_2 J0_3 J0_4 J0_5 J0_6 J0_7 J0_8 J0_9 J0_10 J0_11 J0_12 J0_13 J0_14 J0_15 J1_1 J1_2 J1_3 J1_4 J1_5 J1_6 J1_7 J1_8 J1_9 J1_10 J1_11 J1_12 J1_13 J1_14 J1_15 J2_1 J2_2 J2_3 J2_4 J2_5 J2_6 J2_7 J2_8 J2_9 J2_10 J2_11 J2_12 J2_13 J2_14 J2_15 J3 J4 J5: library part 0929-0-15-20-75-14-11-0
J1: "Molex 2 Position Board Header, RIght Angle", Manufacturer=Molex, Voltage=600V, ComponentLink1Description=Datasheet, ComponentLink1URL=http://www.mouser.com/ds/2/418/NG_CD_1445088_A1-614413.pdf, PartNumber=43650-0209, Published=13Aug2018, Publisher=T.Tallo, Status=Active, TargetLibrary=RITRacing-Connectors
J2: "Molex 6 Position Board Header, RIght Angle", Manufacturer=Molex, Voltage=600V, ComponentLink1Description=Datasheet, ComponentLink1URL=http://www.mouser.com/ds/2/418/NG_CD_1445088_A1-614413.pdf, PartNumber=43650-0609, Published=13Aug2018, Publisher=T.Tallo, Status=Active, TargetLibrary=RITRacing-Connectors
L0 L1: library part CMP-06045-000059-1, "CMC 100UH 200MA 2LN SMD AEC-Q200", Case Code (Imperial)=1812, Case Code (Metric)=4532, Current=200mA, DC Resistance (DCR)=2R, Inductance=100uH, Max Operating Temperature=125°C, Min Operating Temperature=-40°C, Package Quantity=1, Test Frequency=1MHz, Tolerance=50%, Voltage Rating=50V, Case/Package=1812, Current Rating=200mA, DC Current=200mA, Depth=3.4mm, Height=2.6mm, Lead Free="Lead Free", Length=4.5mm, Max DC Current=200mA, Military Standard=Not, Mount="Surface Mount", Number of Lines=2, Packaging="Tape and Reel", Radiation Hardening=No, REACH SVHC="No SVHC", Shielding=Unshielded, Termination=SMD/SMT, Weight=0.005997oz, Width=0.126inch
M0_1 M0_2 M0_3 M0_4 M0_5 M0_6 M0_7 M0_8 M0_9 M0_10 M0_11 M0_12 M0_13 M0_14 M0_15: "MOSFET P-CH 20V 1A SSOT3", Manufacturer 1="ON Semiconductor", Supplier Part Number 1=NDS332PCT-ND, ClassName=Mosfets, ComponentLink1Description=https://datasheet.ciiva.com/931/nds332p-931840.pdf?src-supplier=Digi-Key, ComponentLink1URL=https://datasheet.ciiva.com/931/nds332p-931840.pdf?src-supplier=Digi-Key, ComponentLink2Description=https://datasheet.ciiva.com/22681/1815140-22681925.pdf?src-supplier=Element14, ComponentLink2URL=https://datasheet.ciiva.com/22681/1815140-22681925.pdf?src-supplier=Element14, ComponentLink3Description=https://datasheet.ciiva.com/19479/874752-19479886.pdf?src-supplier=Jameco, ComponentLink3URL=https://datasheet.ciiva.com/19479/874752-19479886.pdf?src-supplier=Jameco, ComponentLink4Description=https://datasheet.ciiva.com/4441/nds332p-96390-4441376.pdf?src-supplier=Mouser, ComponentLink4URL=https://datasheet.ciiva.com/4441/nds332p-96390-4441376.pdf?src-supplier=Mouser, ComponentLink5Description=https://datasheet.ciiva.com/6037/192744-6037617.pdf?src-supplier=Farnell, ComponentLink5URL=https://datasheet.ciiva.com/6037/192744-6037617.pdf?src-supplier=Farnell, ComponentLink6Description=https://datasheet.ciiva.com/22681/1815140-22681813.pdf?src-supplier=Element14, ComponentLink6URL=https://datasheet.ciiva.com/22681/1815140-22681813.pdf?src-supplier=Element14, ComponentLink7Description=https://datasheet.ciiva.com/22681/1815140-22681814.pdf?src-supplier=Element14, ComponentLink7URL=https://datasheet.ciiva.com/22681/1815140-22681814.pdf?src-supplier=Element14, ComponentLink8Description=https://datasheet.ciiva.com/22681/1815140-22681815.pdf?src-supplier=Element14, ComponentLink8URL=https://datasheet.ciiva.com/22681/1815140-22681815.pdf?src-supplier=Element14, ComponentLink9Description=https://datasheet.ciiva.com/931/nds332p-931841.pdf?src-supplier=Digi-Key, ComponentLink9URL=https://datasheet.ciiva.com/931/nds332p-931841.pdf?src-supplier=Digi-Key, ComponentLink10Description=https://datasheet.ciiva.com/6037/192744-6037734.pdf?src-supplier=Farnell, ComponentLink10URL=https://datasheet.ciiva.com/6037/192744-6037734.pdf?src-supplier=Farnell, ComponentLink11Description=https://datasheet.ciiva.com/16772/nds332p-16772443.pdf?src-supplier=Future+Electronics, ComponentLink11URL=https://datasheet.ciiva.com/16772/nds332p-16772443.pdf?src-supplier=Future+Electronics, ComponentLink12Description=https://datasheet.ciiva.com/8114/nds332p-8114766.pdf?src-supplier=Avnet, ComponentLink12URL=https://datasheet.ciiva.com/8114/nds332p-8114766.pdf?src-supplier=Avnet, Manufacturer Part Number 1=NDS332P, Pricing 1="1=0.37000, 10=0.29600, 100=0.20180, 500=0.15132, 1000=0.11349 (USD)", RoHS=No, Stock 1=103711, Supplier 1=Digi-Key
Q0 Q1: library part CMP-1048-00450-1, "100 V, 2 A, Low VCE(sat), NPN Transistor, 4-Pin SOT-223, Pb-Free, Tape and Reel", Manufacturer="On Semiconductor", ComponentLink1Description="Manufacturer URL", ComponentLink1URL=http://www.onsemi.com/, ComponentLink2Description=Datasheet, ComponentLink2URL=http://www.onsemi.cn/pub_link/Collateral/NSS1C201MZ4-D.PDF, ComponentLink3Description="Package Specification", ComponentLink3URL=http://www.onsemi.com/pub_link/Collateral/318E-04.PDF, DatasheetVersion="Rev. 4", IC Continuous (A)=2, Mounting Technology="Surface Mount", Note1=0, PackageDescription="4-Pin Small Outline Transistor, Body 6.5 x 3.5 mm, Pitch 2.3 mm", PackageReference=SOT-223-4-318E-04, PackageVersion="Rev. N, 08/2009", Packing="Tape and Reel", PartNumber=NSV1C201MZ4T1G, Polarity=NPN, RoHS=TRUE
R0 R3 R41 R43: library part SFR16S0001000FR500, "Res Metal Film 100 Ohm 1% 1/2W 100ppm/C Conformal AXL Thru-Hole T/R", Case/Package=Axial, Manufacturer 1="Vishay BCcomponents", Max Operating Temperature=155°C, Max Power Dissipation=500mW, Min Operating Temperature=-55°C, Package Quantity=1, Resistance=100R, Resistance Tolerance=1%, Resistor Type="Metal Film", Temperature Coefficient=100ppm/°C, Voltage Rating=200V, Category="Through-Hole Resistors", ComponentLink1Description=https://datasheet.ciiva.com/2710/sfr16s25-2710549.pdf?src-supplier=Digi-Key, ComponentLink1URL=https://datasheet.ciiva.com/2710/sfr16s25-2710549.pdf?src-supplier=Digi-Key, ComponentLink2Description=https://datasheet.ciiva.com/16427/sfr16s25-16427365.pdf?src-supplier=Future+Electronics, ComponentLink2URL=https://datasheet.ciiva.com/16427/sfr16s25-16427365.pdf?src-supplier=Future+Electronics, ComponentLink3Description=https://datasheet.ciiva.com/2710/sfr16s25-2710550.pdf?src-supplier=Digi-Key, ComponentLink3URL=https://datasheet.ciiva.com/2710/sfr16s25-2710550.pdf?src-supplier=Digi-Key, ComponentLink4Description=https://datasheet.ciiva.com/28605/1911160-28605898.pdf?src-supplier=Element14, ComponentLink4URL=https://datasheet.ciiva.com/28605/1911160-28605898.pdf?src-supplier=Element14, ComponentLink5Description=https://datasheet.ciiva.com/48523/sfr16s25-48523466.pdf?src-supplier=Avnet, ComponentLink5URL=https://datasheet.ciiva.com/48523/sfr16s25-48523466.pdf?src-supplier=Avnet, ComponentLink6Description=https://datasheet.ciiva.com/8321/sfr16s25-8321901.pdf?src-supplier=Avnet, ComponentLink6URL=https://datasheet.ciiva.com/8321/sfr16s25-8321901.pdf?src-supplier=Avnet, Contact Plating=Tin, Diameter=1.9mm, Lead Diameter=0.45mm, Lead Free="Lead Free", Length=0.138inch, Manufacturer Part Number 1=SFR16S0001000FR500, Mount="Through Hole", Number of Terminations=2, Packaging="Cut Tape", Power Rating=500mW, Pricing 1="1=0.19000, 10=0.15700, 25=0.11440, 50=0.08300, 100=0.06150, 250=0.04720, 500=0.03718, 1000=0.02574 (USD)", Radiation Hardening=No, REACH SVHC=Unknown, RoHS=Yes, RoHS Compliant=Yes, Series=SFR16S, Stock 1=3242, Supplier 1=Digi-Key, Termination=Axial, Tolerance=1%, Voltage Rating (DC)=200V
R0_1 R0_2 R0_3 R0_4 R0_5 R0_6 R0_7 R0_8 R0_9 R0_10 R0_11 R0_12 R0_13 R0_14 R0_15: library part RNMF14FTC3K30, "RES 3.3K OHM 1/4W 1% AXIAL", Case/Package=Axial, Manufacturer 1="Stackpole Electronics", Max Operating Temperature=155°C, Max Power Dissipation=250mW, Min Operating Temperature=-55°C, Package Quantity=1, Resistance=3.3kR, Resistor Type="Metal Film", Temperature Coefficient=50ppm/°C, Tolerance=1%, Category="Through-Hole Resistors", ComponentLink1Description=https://www.seielect.com/catalog/SEI-Packaging.pdf?src-supplier=Digi-Key, ComponentLink1URL=https://www.seielect.com/catalog/SEI-Packaging.pdf?src-supplier=Digi-Key, Features="Flame Retardant Coating", Length=0.13inch, Manufacturer Part Number 1=RNMF14FTC3K30, Number of Terminations=2, Packaging="Tape and Reel", Pricing 1="1=0.10000, 10=0.06500, 25=0.04720, 50=0.03600, 100=0.02660, 250=0.02024, 500=0.01620, 1000=0.01192 (USD)", RoHS=Yes, RoHS Compliant=Yes, Series=RNMF, Stock 1=29584, Supplier 1=Digi-Key
R1_1 R1_2 R1_3 R1_4 R1_5 R1_6 R1_7 R1_8 R1_9 R1_10 R1_11 R1_12 R1_13 R1_14 R1_15 R2 R14 R42 R58: library part RNF14FTD100R, "RES 100 OHM 1/4W 1% AXIAL", Case/Package=Conformal, Manufacturer 1="Stackpole Electronics", Max Operating Temperature=155°C, Max Power Dissipation=250mW, Min Operating Temperature=-55°C, Package Quantity=5000, Resistor Type="Metal Film", Temperature Coefficient=100ppm/°C, Tolerance=1%, Working Voltage=250V, Category="Through-Hole Resistors", ComponentLink1Description=https://datasheet.ciiva.com/19454/2163891-19454777.pdf?src-supplier=Jameco, ComponentLink1URL=https://datasheet.ciiva.com/19454/2163891-19454777.pdf?src-supplier=Jameco, Construction=Cylindrical, Contact Plating=Copper,Tin, Diameter=2.35mm, Features="Flame Retardant Coating", Lead Free="Lead Free", Length=6.35mm, Manufacturer Part Number 1=RNF14FTD100R, Military Standard=Not, Mount="Through Hole,Axial", Number of Terminations=2, Packaging="Tape and Reel", Power Rating=250mW, Pricing 1="1=0.10000, 10=0.06500, 25=0.04480, 50=0.03500, 100=0.02500, 250=0.01952, 500=0.01550, 1000=0.01100 (USD)", Radiation Hardening=No, Resistance=100R, RoHS=Yes, RoHS Compliant=Yes, Series=RNF, Stock 1=121720, Supplier 1=Digi-Key, Technology="METAL FILM", Termination=Axial
R2_1 R2_2 R2_3 R2_4 R2_5 R2_6 R2_7 R2_8 R2_9 R2_10 R2_11 R2_12 R2_13 R2_14 R2_15: library part NKN200FR-73-16R, "RES 16 OHM 2W 1% AXIAL", Case/Package=Axial, Manufacturer 1=Yageo, Max Operating Temperature=200°C, Max Power Dissipation=2W, Min Operating Temperature=-40°C, Package Quantity=1000, Resistance=16R, Resistor Type=Wirewound, Temperature Coefficient=300ppm/°C, Tolerance=1%, Category="Through-Hole Resistors", ComponentLink1Description=https://media.digikey.com/pdf/Data%20Sheets/Yageo%20PDFs/NKN%20Series.pdf?src-supplier=Digi-Key, ComponentLink1URL=https://media.digikey.com/pdf/Data%20Sheets/Yageo%20PDFs/NKN%20Series.pdf?src-supplier=Digi-Key, Features="Flame Retardant Coating", Length=0.61inch, Manufacturer Part Number 1=NKN200FR-73-16R, Number of Terminations=2, Packaging="Tape and Reel", RoHS=Yes, Supplier 1=Digi-Key
R3_1 R3_2 R3_3 R3_4 R3_5 R3_6 R3_7 R3_8 R3_9 R3_10 R3_11 R3_12 R3_13 R3_14 R3_15: library part RNF18FTC180R, "RES 180 OHM 1/8W 1% AXIAL", Case/Package=Axial, Manufacturer 1="Stackpole Electronics", Max Operating Temperature=155°C, Max Power Dissipation=125mW, Min Operating Temperature=-55°C, Package Quantity=5000, Resistor Type="Metal Film", Temperature Coefficient=50ppm/°C, Tolerance=1%, Category="Through-Hole Resistors", ComponentLink1Description=http://www.seielect.com/Catalog/SEI-RNF_RNMF.pdf?src-supplier=Digi-Key, ComponentLink1URL=http://www.seielect.com/Catalog/SEI-RNF_RNMF.pdf?src-supplier=Digi-Key, ComponentLink2Description=https://www.seielect.com/Catalog/SEI-RNF_RNMF.pdf?src-supplier=Avnet, ComponentLink2URL=https://www.seielect.com/Catalog/SEI-RNF_RNMF.pdf?src-supplier=Avnet, Contact Plating=Copper,Tin, Diameter=1.8mm, Features="Flame Retardant Coating", Length=0.13inch, Manufacturer Part Number 1=RNF18FTC180R, Mount="Through Hole,Axial", Number of Terminations=2, Packaging="Tape and Reel", Pricing 1="5000=0.01846, 10000=0.01820, 20000=0.01768, 30000=0.01729, 40000=0.01664, 50000=0.01625, 500000=0.01586 (USD)", Radiation Hardening=No, Resistance=180R, RoHS=Yes, RoHS Compliant=Yes, Series=RNF, Supplier 1=Avnet
R4 R44: library part ERJ-8ENF1211V, "RES 1.21KR 1% 0805 1/4W", Manufacturer=Panasonic, Part Number=ERJ-8ENF1211V
R5 R45: library part ERJ-8ENF8060V, "RES 806R 1% 0805 1/4W", Manufacturer=Panasonic, Part Number=ERJ-8ENF8060V
R6 R7 R12 R13: library part RNMF14FTC300R, "RES 300 OHM 1/4W 1% AXIAL", Case/Package=Axial, Manufacturer 1="Stackpole Electronics", Max Operating Temperature=155°C, Max Power Dissipation=250mW, Min Operating Temperature=-55°C, Package Quantity=1, Resistor Type="Metal Film", Temperature Coefficient=50ppm/°C, Tolerance=1%, Category="Through-Hole Resistors", ComponentLink1Description=http://www.seielect.com/Catalog/SEI-RNF_RNMF.pdf?src-supplier=Avnet, ComponentLink1URL=http://www.seielect.com/Catalog/SEI-RNF_RNMF.pdf?src-supplier=Avnet, ComponentLink2Description=https://www.seielect.com/catalog/SEI-Packaging.pdf?src-supplier=Digi-Key, ComponentLink2URL=https://www.seielect.com/catalog/SEI-Packaging.pdf?src-supplier=Digi-Key, Contact Plating=Tin,Matte, Diameter=2.35mm, Features="Flame Retardant Coating", Length=0.13inch, Manufacturer Part Number 1=RNMF14FTC300R, Mount="Through Hole", Number of Terminations=2, Packaging="Tape and Reel", Pricing 1="1=0.10000, 10=0.06500, 25=0.04720, 50=0.03600, 100=0.02660, 250=0.02024, 500=0.01620, 1000=0.01192 (USD)", Radiation Hardening=No, Resistance=300R, RoHS=Yes, RoHS Compliant=Yes, Series=RNMF, Stock 1=2958, Supplier 1=Digi-Key
R8 R9 R10 R11 R32 R33 R38 R39: library part RNMF14FTC62R0, "RES 62 OHM 1/4W 1% AXIAL", Case/Package=Axial, Manufacturer 1="Stackpole Electronics", Max Operating Temperature=155°C, Max Power Dissipation=250mW, Min Operating Temperature=-55°C, Package Quantity=1, Resistor Type="Metal Film", Temperature Coefficient=50ppm/°C, Tolerance=1%, Category="Through-Hole Resistors", ComponentLink1Description=https://www.seielect.com/catalog/SEI-Packaging.pdf?src-supplier=Digi-Key, ComponentLink1URL=https://www.seielect.com/catalog/SEI-Packaging.pdf?src-supplier=Digi-Key, Features="Flame Retardant Coating", Length=0.13inch, Manufacturer Part Number 1=RNMF14FTC62R0, Number of Terminations=2, Packaging="Tape and Reel", Pricing 1="1=0.10000, 10=0.06500, 25=0.04720, 50=0.03600, 100=0.02660, 250=0.02024, 500=0.01620, 1000=0.01192 (USD)", Resistance=62R, RoHS=Yes, RoHS Compliant=Yes, Series=RNMF, Stock 1=4795, Supplier 1=Digi-Key
R35 R36 R37: library part ERJ-PB6B1002V, "RES SMD 10K OHM 0.1% 1/4W 0805", Case Code (Imperial)=0805, Case Code (Metric)=2012, Manufacturer 1=Panasonic, Max Operating Temperature=155°C, Max Power Dissipation=250mW, Min Operating Temperature=-55°C, Resistor Type="Thick Film", Temperature Coefficient=50ppm/°C, Tolerance=0.1%, Case/Package=0805, Category="Chip SMD Resistors", ComponentLink1Description=https://industrial.panasonic.com/sa/system/files/data/download/catalog/id_fixed-resistors_e_2.pdf?src-supplier=Digi-Key, ComponentLink1URL=https://industrial.panasonic.com/sa/system/files/data/download/catalog/id_fixed-resistors_e_2.pdf?src-supplier=Digi-Key, ComponentLink2Description=https://industrial.panasonic.com/cdbs/www-data/pdf/RDM0000/DMM0000COL5.pdf?src-supplier=Digi-Key, ComponentLink2URL=https://industrial.panasonic.com/cdbs/www-data/pdf/RDM0000/DMM0000COL5.pdf?src-supplier=Digi-Key, Features="Automotive AEC-Q200", Height - Seated (Max)=0.028inch, Length=0.079inch, Manufacturer Part Number 1=ERJ-PB6B1002V, Number of Terminations=2, Packaging="Tape and Reel", Pricing 1="1=0.33000, 10=0.27800, 25=0.20240, 50=0.14680, 100=0.10880, 250=0.08348, 500=0.06578, 1000=0.04554 (USD)", Resistance=10kR, RoHS=Yes, Stock 1=40490, Supplier 1=Digi-Key, Width=0.049inch
T0 T1 T2: "No Description Available", Built_By=EMA_Cory, Copyright="Copyright (C) 2018 Accelerated Designs. All rights reserved", Manufacturer_Part_Number=PE-68386NLT, RefDes=RefDes, SourceLibrary=Pulse_Electronics_2019-12-18, Type=DEV, Vendor="Pulse Electronics Corporation"
U0 U1: library part CMP-0471-00242-1, "Multicell Battery Monitor, 60 V Vin MAX, 48-pin SOP (G-48), -40 to 125 degC, Pb-Free, Tape and Reel", Manufacturer="Linear Technology", Battery Chemistry="Li-Ion, Li-Polymer, NiMH", ComponentLink1Description="Manufacturer URL", ComponentLink1URL=http://www.linear.com/, ComponentLink2Description=Datasheet, ComponentLink2URL=http://cds.linear.com/docs/en/datasheet/680412f.pdf, ComponentLink3Description="Package Specification", ComponentLink3URL=http://cds.linear.com/docs/en/packaging/05081887_0_G48.pdf, Mounting Technology="Surface Mount", Number of Cells="> 1000 V of stacked Li-Ion cells", PackageDescription="48-Pin Plastic SSOP, Body 12.8 x 5.3 mm, Pitch 0.5 mm", PackageReference=G-48, PackageVersion="Rev. Ã˜, 01/2011", Packing="Tape and Reel", PartNumber=LTC6804HG-1#TRPBF, RoHS=TRUE, Type of Charger="Battery Stack Monitor", Vin Max(V)=60

## Free pads (board coordinates)
  round 160 hole 112: 11(2555,4905) 12(2555,1280) 13(3830,4080) 14(3830,250)

## Via types
v1: diameter 24, hole 12, Top Layer to Bottom Layer, 45 vias

## Nets (pads, with @x,y where several pads share a name; then routed paths per layer and width w, separated by ;. In a path a pad name is that pad's centre, name@x,y a point inside that pad or via, vN(x,y) a via of type N, cw(c..) or ccw(c..) an arc to the next point about the centre after c; other vN are vias at no path point)
1-C1: C0_14.1 C0_15.2 R1_15.1 U0.24 | length 6465
  Top Layer w10: C0_15.2@387.6,1777.4 472.4,1777.4 R1_15.1@520,1825 585,1890 1195,1890 1415,1670 1415,1247 1455,1207 2227.76,1207 2337.38,1097.38 ; C0_14.1@2484.76,950 2337.38,1097.38 ; U0.24@3786.38,1640.16 3786.38,1501.44 3981,1306.82 3981,476 3920,415 3850,415 3560,125 3103,125 2548,680 2470,680 2240,910 2240,1000 2337.38,1097.38
1-C2: C0_13.1 C0_14.2 R1_14.1 U0.22 | length 2868.2
  Top Layer w10: U0.22@3747.01,1640.16 3747.01,1467.99 3900,1315 C0_13.1@3900,750
  Bottom Layer w10: R1_14.1@2180,980 2410,750 C0_14.2@2484.76,750 3528.5,750 3648.5,870 3780,870 C0_13.1@3900,750
1-C3: C0_12.1 C0_13.2 R1_13.1 U0.20 | length 3056.6
  Top Layer w10: R1_13.1@3700,525 3635,590 3455,590 3377,668 3377,1007 3707.64,1337.64 U0.20@3707.64,1640.16
  Bottom Layer w10: R1_13.1@3700,525 3701.84,525 3726.84,550 C0_13.2@3900,550 3998,648 4378,648 4728,998 4780.61,998 4844.45,934.16 4933,934.16 4948.84,950 C0_12.1@5036.3,950
1-C4: C0_12.2 R1_12.1 U0.18 | length 2302.9
  Top Layer w10: U0.18@3668.27,1683.39 3668.27,1711.24 3670.96,1713.94 3670.96,1714.14 3676.82,1720 3840,1720 3968,1592 3968,1472.46 4312.46,1128 4773.32,1128 5036.3,865.02 C0_12.2@5036.3,750
  Bottom Layer w10: R1_12.1@4761.3,965 4976.3,750 C0_12.2@5036.3,750
1-C7: C0_8.2 C0_9.1 R1_8.1 U0.12 | length 2528.9
  Top Layer w10: U0.12@3550.16,1640.16 3550.16,1491 v1(3570.16,1471) ; R1_8.1@5410,2035 5450,2075 C0_8.2@5450,2270
  Bottom Layer w10: v1(3570.16,1471) 4134.15,1471 C0_9.1@4690,2026.85 4831,2026.85 4862.85,1995 5370,1995 R1_8.1@5410,2035
1-C8: C0_9.2 C0_10.1 R1_9.1 U0.10 | length 2722.1
  Top Layer w10: v1(3510.79,1543) U0.10@3510.79,1640.16
  Bottom Layer w10: v1(3510.79,1543) 4006.15,1543 C0_9.2@4490,2026.85 ; C0_10.1@3695.24,2325 3993.39,2026.85 C0_9.2@4490,2026.85 ; R1_9.1@4985,2051.85 4958.85,2078 4541.15,2078 C0_9.2@4490,2026.85
1-C9: C0_10.2 C0_11.1 R1_10.1 U0.8 | length 3435.4
  Top Layer w10: C0_11.1@2595,1980 2595,1633 2959,1269 3434,1269 3471.42,1306.42 U0.8@3471.42,1640.16 ; C0_10.2@3895.24,2325 3895.24,2385 3960.24,2450 R1_10.1@3990.24,2450
  Bottom Layer w10: C0_11.1@2595,1980 2719,1980 2898,2159 3472,2159 3626.74,2313.74 3626.74,2365.24 3655,2393.5 3826.74,2393.5 C0_10.2@3895.24,2325
1-C10: C0_11.2 R1_11.1 U0.6 | length 2144.3
  Top Layer w10: v1(3283,1502) 3283,1322 3300,1305 3419.09,1305 3432.05,1317.96 U0.6@3432.05,1640.16